# Altium PCB PCB2.PcbDoc
Units mm, origin at the board's own origin, x right, y up, seen from the top; angles counter-clockwise.
Board outline 38.73 x 29.08 mm, 2 copper layers (Top Layer, Bottom Layer); 36 components, 30 nets, 162 pads, 19 vias.
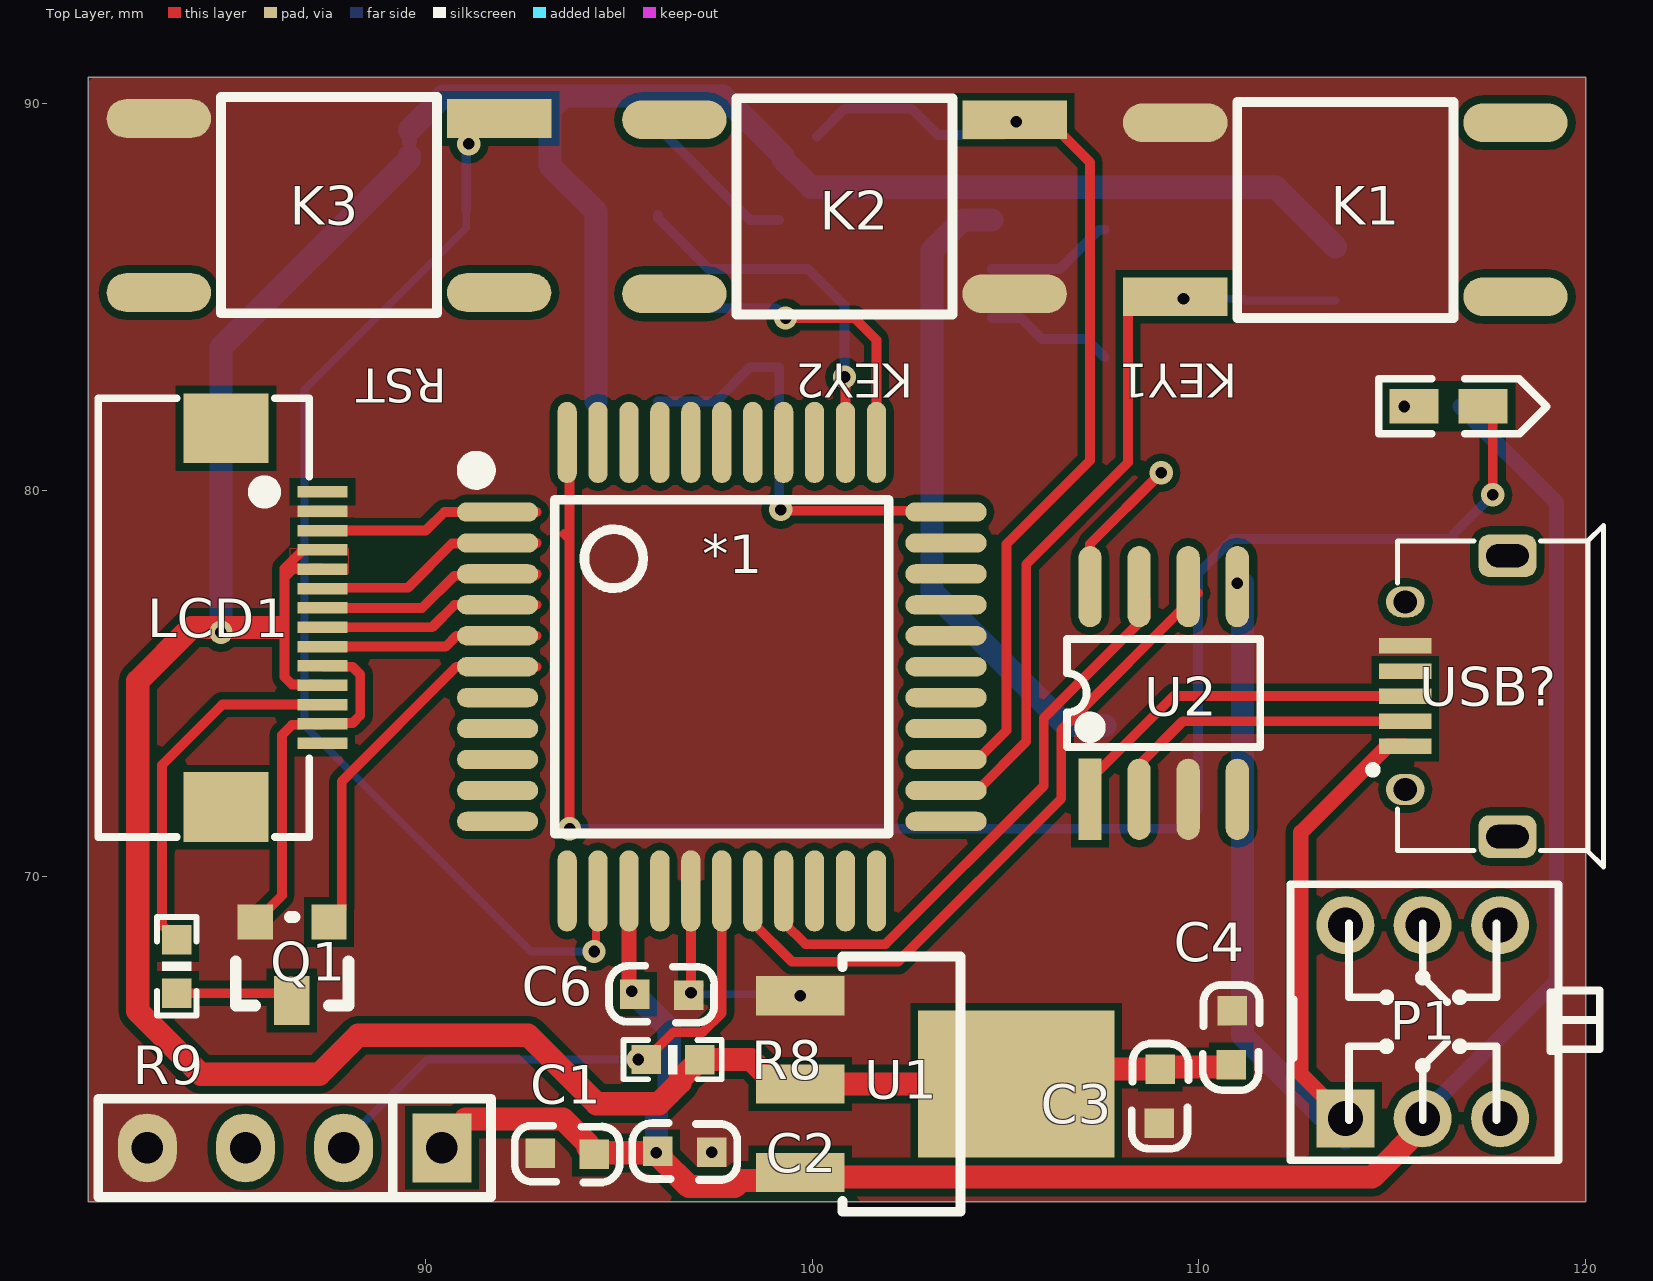
[diagram p0: Top Layer view]
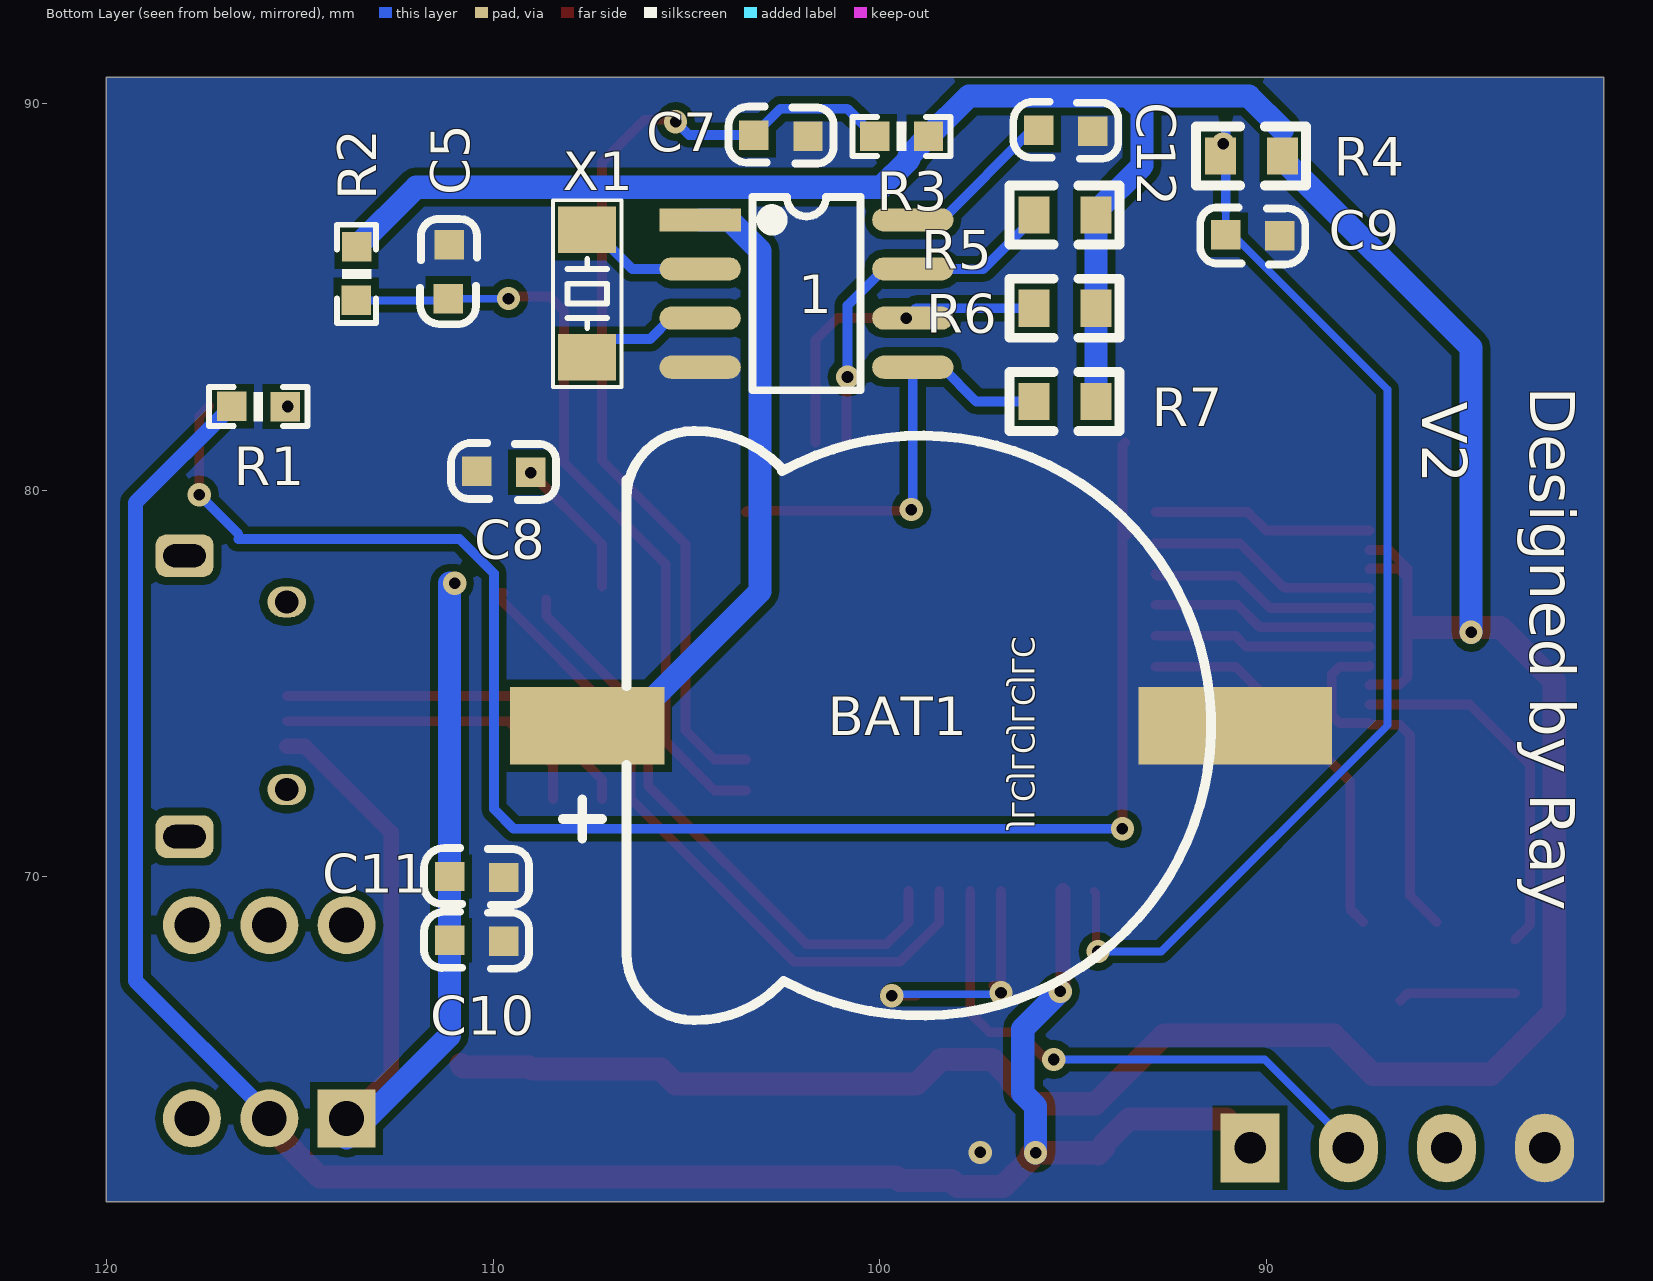
[diagram p1: Bottom Layer view, seen from below]
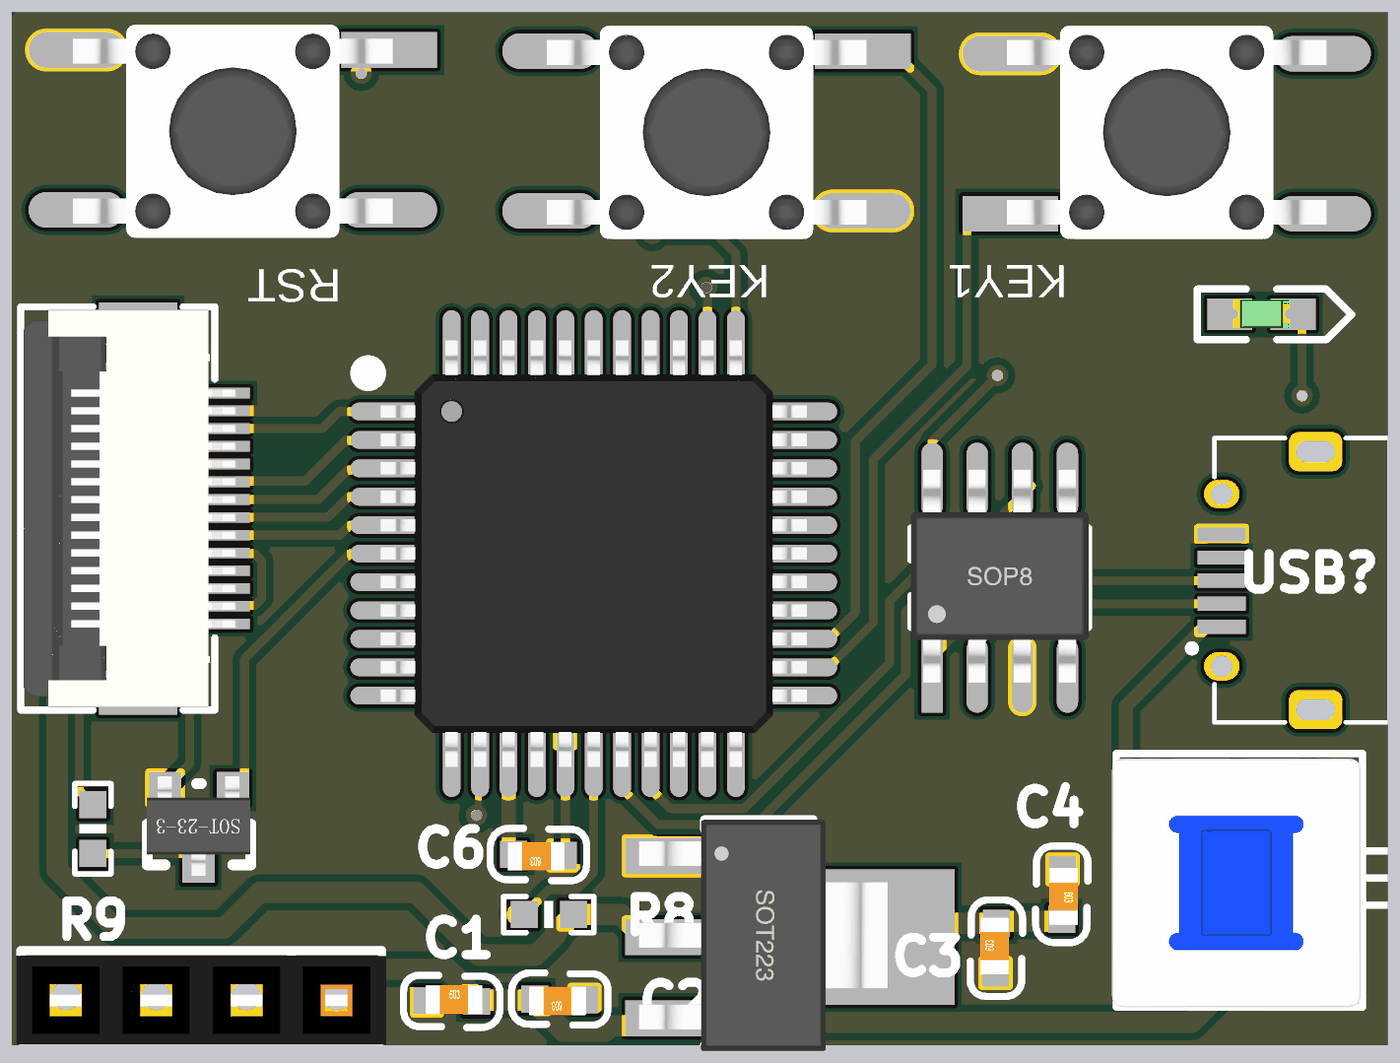
[diagram p2: 3D render of the assembled board from above, using the file's embedded part models]
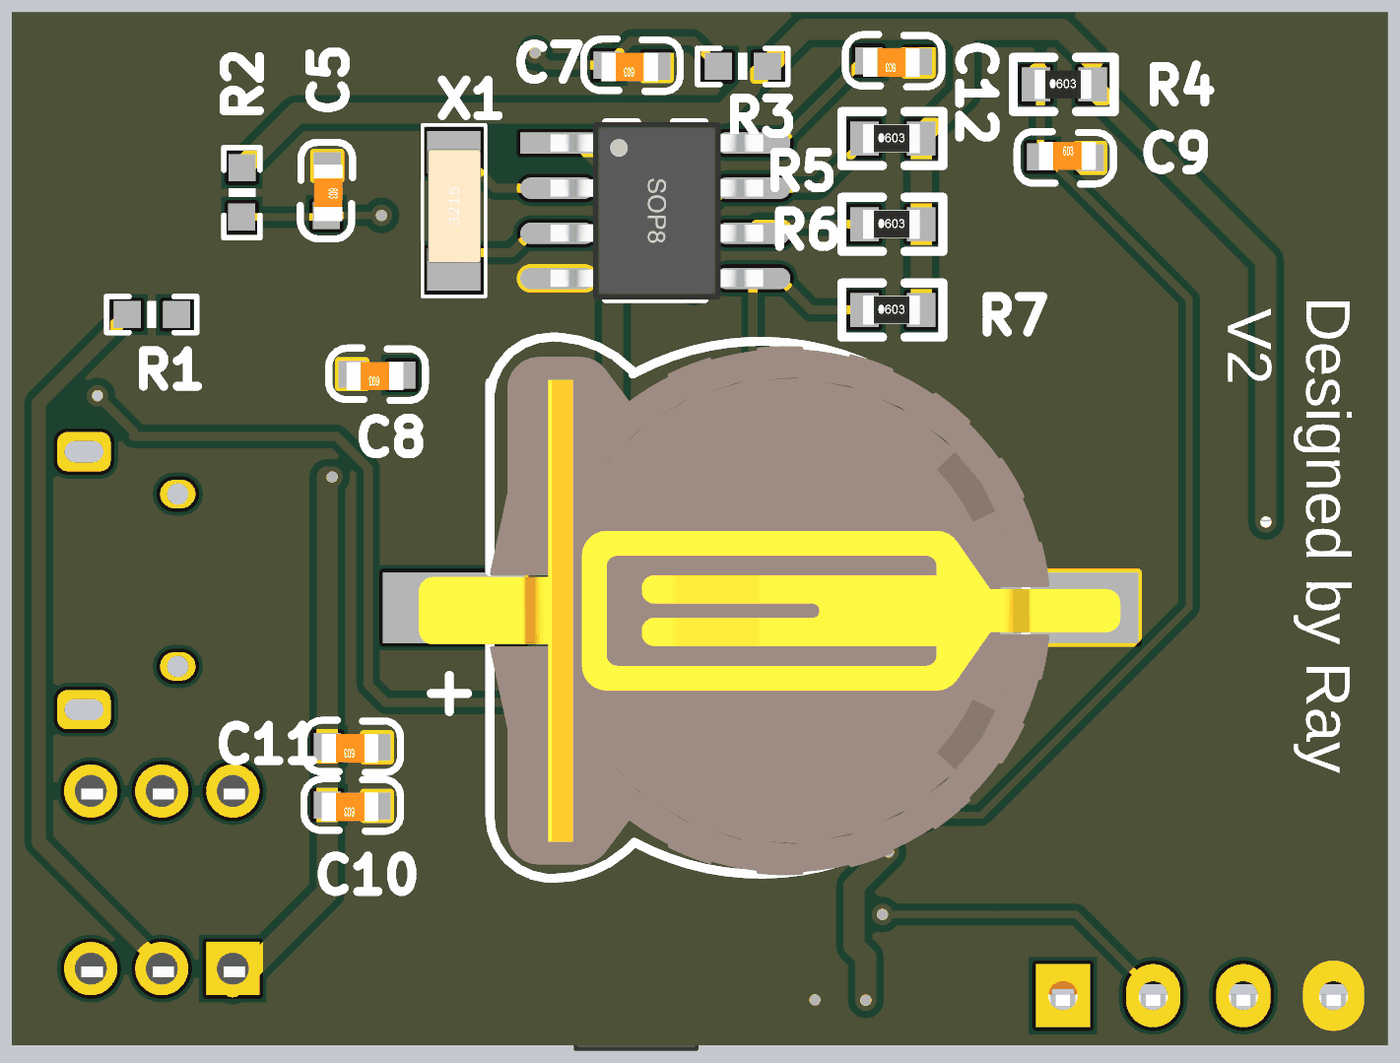
[diagram p3: 3D render of the assembled board from below, using the file's embedded part models]

## Layer stack, top to bottom
Top Solder: solder mask 0.0102, Solder Resist, Dk 3.5
Top Layer: signal copper 0.0356
Dielectric 1: dielectric 0.32, FR-4, Dk 4.8
Bottom Layer: signal copper 0.0356
Bottom Solder: solder mask 0.0102, Solder Resist, Dk 3.5

## Board outline
81.28,61.595 81.28,90.678 120.015,90.678 120.015,61.595

## Design rules (kind name [scope] priority, off if disabled: settings)
Clearance [All] p1: gap=0.2 ignorepadtopadclearanceinfootprint=FALSE
PlaneConnect [All] p1: planeconnectstyle=Direct reliefexpansion=0.508 reliefentries=4 reliefconductorwidth=0.254 reliefairgap=0.254
PolygonConnect [All] p1: connectstyle=Direct reliefconductorwidth=0.254 reliefentries=4 polygonreliefangle="90 Angle" airgapwidth=0.254
RoutingVias [All] p1: holewidth=0.711 width=1.27 viastyle="Through Hole" minholewidth=0.711 minwidth=1.27 maxholewidth=0.711 maxwidth=1.27
SolderMaskExpansion [All] p1: expansion=0.102
Width [All] p1: maxlimit=0.6 minlimit=0.2 preferedwidth=0.6
29 further rules are at their usual default settings.

## Classes and differential pairs
component class Sheet1: 1 *1 BAT1 C1 C2 C3 C4 C5 C6 C7 C8 C9 C10 C11 C12 K1 K2 K3 LCD1 P1 Q1 R1 R2 R3 R4 R5 R6 R7 R8 R9 U1 U2 USB? X1

## Components (designator, comment, footprint, x,y, rotation, side; value= is the part's Value field where it differs from the comment)
1 "DS1302ZN" SOP8 104.648,86.995 r180 bottom
*1 "STC8F2K60S4" LQFP44 97.79,75.438 r0 top
BAT1 "CR1220" CR1220-A1 107.569,73.914 r0 bottom
C1 "10uF" 0603C 92.964,62.865 r0 top
C2 "10uF" 0603C 97.409,62.865 r180 top
C3 "10uF" 0603C 108.966,63.627 r90 top
C4 "10uF" 0603C 110.871,66.548 r270 top
C5 "0.1uF" 0603C 111.125,86.36 r270 bottom
C6 "0.1uF" 0603C 96.81,66.933 r180 top
C7 "0.1uF" 0603C 101.854,89.154 r0 bottom
C8 "0.1uF" 0603C 109.029,80.454 r0 bottom
C9 "0.1uF" 0603C 91.059,86.614 r180 bottom
C10 "10uF" 0603C 109.728,68.326 r0 bottom
C11 "10uF" 0603C 109.728,69.977 r0 bottom
C12 "0.1uF" 0603C 94.488,89.281 r0 bottom
D1 "LED" LED-0603B 115.57,82.169 r0 top
K1 "KEY_M" SMD-6X6X5 109.474,85.09 r90 top
K2 "KEY_M" SMD-6X6X5 105.156,89.504 r270 top
K3 "KEY" SMD-6X6X5 91.821,89.535 r270 top
LCD1 "1.8寸SPI屏" FPC0.5-14P 84.836,76.708 r270 top
P1 "Header 3X2" "KFT DIP-7X7" 113.792,63.754 r90 top
Q1 "NPN" SOT-23 86.614,67.945 r180 top
R1 "1K" 0603P 116.078,82.169 r180 bottom
R2 "10K" 0603P 113.538,85.598 r90 bottom
R3 "10K" 0603P 99.441,89.154 r180 bottom
R4 "10K" 0603R 91.186,88.646 r180 bottom
R5 "10K" 0603R 96.012,87.122 r180 bottom
R6 "10K" 0603R 96.012,84.709 r180 bottom
R7 "10K" 0603R 96.012,82.296 r180 bottom
R8 "10K" 0603P 96.393,65.278 r0 top
R9 "10R" 0603P 83.566,67.691 r270 top
U1 "AMS1117" SOT223 99.695,64.643 r270 top
U2 "CH330N" sop8 107.188,72.009 r90 top
U3 "DHT11" Fe-HDR1X4/2.54-S 90.424,62.992 r270 top
USB? "USB-AB" USB_AB 117.983,74.676 r270 top
X1 "XTAL-2P" "OSC 3215-2P" 107.569,85.09 r90 bottom

## Footprints (in the part's own frame and the unit in brackets; to place one, negate y for a bottom-side part, rotate by r counter-clockwise, add the part's x,y. Pads: shape width x height; smd on the part's side, far side on the other; paste and mask are expansions set on the pad)
0603C [mil]
  rect 30x30 smd: 1(0.21,-0.35) 2(55.21,-1.35)
  silkscreen extent -26,-30 81,28, body extent -1,-15 62,17, height 12
0603P [mil]
  rect 30x30 smd: 1(-27,0) 2(27.5,-0.06)
  silkscreen extent -50,-20 50,20
0603R [mm]
  rect 0.8x0.965 smd: 1(0,0) 2(1.6,0)
  silkscreen extent -0.64,-0.76 2.21,0.76, body extent -0.04,-0.41 1.56,0.41, height 0.45
CR1220-A1 [mm]
  rect 4x2 smd: 1(0,0)
  rect 5x2 smd: 2(-16.764,0)
  silkscreen extent -16.13,-7.62 0.64,7.62, body extent -18.77,-7.37 0.99,7.53, height 4.05
Fe-HDR1X4/2.54-S [mil]
  rect 70x60 hole 32: 1(0,0)
  oval 70x60 hole 32: 2(0,-100) 3(0,-200) 4(0,-300)
  silkscreen extent -50,-350 50,50, body extent -44,-355 54,55, height 335
FPC0.5-14P [mm]
  rect 1.8x2.2 smd: 0(-4.9,0) 0(4.9,0)
  rect 0.3x1.3 smd: 1(-3.25,2.497) 2(-2.75,2.497) 3(-2.25,2.497) 4(-1.75,2.497) 5(-1.25,2.497) 6(-0.75,2.497) 7(-0.25,2.497) 8(0.25,2.497) 9(0.75,2.497) 10(1.25,2.497) 11(1.75,2.497) 12(2.25,2.497) 13(2.75,2.497) 14(3.25,2.497)
  silkscreen extent -5.68,-3.3 5.68,2.16, body extent -5.6,-3.23 5.6,2.77, height 2
"KFT DIP-7X7" [mm]
  rect 1.5x1.5 hole 0.9: 1(0,0)
  round 1.5 hole 0.9: 2(0,-2) 3(0,-4) 4(5,-4) 5(5,-2) 6(5,0)
  silkscreen extent -1.08,-6.58 6.06,1.42, body extent -1.09,-5.46 5.91,1.54, height 11.2
LED-0603B [mil]
  rect 50x35 smd: A(0,0.26) K(70,0.26)
  silkscreen extent -36,-28 135,28, body extent 4,-15 66,17, height 24
LQFP44 [mm]
  oval 2.1x0.5 smd: 1(-5.927,4) 2(-5.927,3.2) 3(-5.927,2.4) 4(-5.927,1.6) 5(-5.927,0.8) 6(-5.927,0) 7(-5.927,-0.8) 8(-5.927,-1.6) 9(-5.927,-2.4) 10(-5.927,-3.2) 11(-5.927,-4) 23(5.673,-4) 24(5.673,-3.2) 25(5.673,-2.4) 26(5.673,-1.6) 27(5.673,-0.8) 28(5.673,0) 29(5.673,0.8) 30(5.673,1.6) 31(5.673,2.4) 32(5.673,3.2) 33(5.673,4)
  oval 0.5x2.1 smd: 12(-4.127,-5.8) 13(-3.327,-5.8) 14(-2.527,-5.8) 15(-1.727,-5.8) 16(-0.927,-5.8) 17(-0.127,-5.8) 18(0.673,-5.8) 19(1.473,-5.8) 20(2.273,-5.8) 21(3.073,-5.8) 22(3.873,-5.8) 34(3.873,5.8) 35(3.073,5.8) 36(2.273,5.8) 37(1.473,5.8) 38(0.673,5.8) 39(-0.127,5.8) 40(-0.927,5.8) 41(-1.727,5.8) 42(-2.527,5.8) 43(-3.327,5.8) 44(-4.127,5.8)
  silkscreen extent -6.73,-4.32 4.19,5.33, body extent -6.13,-6 5.87,6, height 1.5
"OSC 3215-2P" [mm]
  rect 1.2x1.5 smd: 1(-1.65,0) 2(1.65,0)
  silkscreen extent -2.41,-0.89 2.41,0.89, body extent -1.47,-0.76 1.73,0.74, height 0.61
SMD-6X6X5 [mm]
  rect 1x2.7 smd: 1(-0.08,0.082)
  oval 1x2.7 smd: 2(4.42,0.082) 3(-0.08,-8.718) 4(4.42,-8.718)
  silkscreen extent -0.63,-7.11 4.95,-1.52, body extent -0.79,-8.82 5.21,0.18, height 4.95
SOP8 [mm]
  rect 2.1x0.6 smd: 1(0,0)
  oval 2.1x0.6 smd: 2(0,-1.27) 3(0,-2.54) 4(0,-3.81) 5(5.5,-3.81) 6(5.5,-2.54) 7(5.5,-1.27) 8(5.5,0)
  silkscreen extent 1.35,-4.41 4.15,0.6, body extent -0.21,-4.4 5.8,0.6, height 1.9
sop8 [mm]
  rect 2.1x0.6 smd: 1(0,0)
  oval 2.1x0.6 smd: 2(0,-1.27) 3(0,-2.54) 4(0,-3.81) 5(5.5,-3.81) 6(5.5,-2.54) 7(5.5,-1.27) 8(5.5,0)
  silkscreen extent 1.35,-4.41 4.15,0.6, body extent -0.21,-4.4 5.8,0.6, height 1.9
SOT223 [mil]
  rect 40x90 smd: 1(-90,0) 2(0,0) 3(90,0)
  rect 150x200 smd: 2(0,220)
  silkscreen extent -130,43 130,163, body extent -130,-30 126,246, height 65
SOT-23 [mil]
  rect 36x36 smd: B(-35,-35) E(40,-35)
  rect 36x50 smd: C(3,45)
  silkscreen extent -55,-40 60,50, body extent -54,-48 60,62, height 47
USB_AB [mm]
  rect 0.4x1.35 smd: 1(1.3,-2.642) 2(0.65,-2.642) 3(0,-2.642) 4(-0.65,-2.642) 5(-1.3,-2.642)
  oval 0.8x1 hole 0.6: 6(-2.438,-2.642) 9(2.413,-2.642)
  rrect50% 1.1x1.5 hole 0.6 slot 1.1 at 90 deg: 7(-3.632,0) 8(3.632,0)
  silkscreen extent -4.42,-3.58 4.42,2.49

## Part data
C1 C2 C3 C4 C6 C9 C12: library part CAP, "无极性电容"
C5 C7 C8 C10 C11: library part Cap, "Capacitor", LatestRevisionDate=17-Jul-2002, LatestRevisionNote="Re-released for DXP Platform.", PackageDescription="Radial Cap, Thru-Hole; 2 Leads; 0.3 in Pin Spacing", PackageReference=RAD-0.3, Published=8-Jun-2000, Publisher="Altium Limited"
P1: "Header, 3-Pin, Dual row", LatestRevisionDate=17-Jul-2002, LatestRevisionNote="Re-released for DXP Platform.", Publisher="Altium Limited"
Q1: "NPN三极管"
R1 R2 R3 R9: library part Res2, "Resistor", LatestRevisionDate=17-Jul-2002, LatestRevisionNote="Re-released for DXP Platform.", PackageDescription="Axial Device, Thru-Hole; 2 Leads; 0.4 in Pin Spacing", PackageReference=AXIAL-0.4, Published=8-Jun-2000, Publisher="Altium Limited"
R4 R5 R6 R7: library part RES
R8: library part R
U1: "三端稳压芯片"
U3: "数字温湿度传感器"
USB?: "MicroUSB"
X1: "2脚无源脚晶振"

## Via types
v1: diameter 0.6, hole 0.3, Top Layer to Bottom Layer, tented both sides, 19 vias

## Nets (pads, with @x,y where several pads share a name; then routed paths per layer and width w, separated by ;. In a path a pad name is that pad's centre, name@x,y a point inside that pad or via, vN(x,y) a via of type N, cw(c..) or ccw(c..) an arc to the next point about the centre after c; other vN are vias at no path point)
3V3: C3.2 C4.2 LCD1.4 LCD1.5 LCD1.11 R2.2 R3.2 R4.2 R5.2 R6.2 R7.2 R8.2 U1.2 | length 98.9
  Top Layer w0.2: 86.352,76.454 86.356,76.458
  Top Layer w0.254: LCD1.11 87.31,74.981 86.548,74.981 86.356,75.173 86.356,76.458 86.356,77.743 ; LCD1.5 87.313,77.978 86.591,77.978 86.356,77.743 ; LCD1.4 86.833,78.458 86.356,77.981 86.356,77.743
  Top Layer w0.6: 86.183,76.454 84.709,76.454 83.947,76.454 82.558,75.065 82.558,66.53 84.191,64.897 87.254,64.897 88.262,65.905 92.655,65.905 94.424,64.135 96.033,64.135 96.588,64.69 96.588,64.773 R8.2 98.427,65.276 99.06,64.643 99.695,64.643 105.283,64.643 105.669,65.029 C3.2 109.058,65.087 110.779,65.087 C4.2
  Bottom Layer w0.4: R4.2@89.586,89.027 R4.2@89.586,89.109
  Bottom Layer w0.6: v1(84.709,76.327) 84.709,83.686 89.586,88.564 R4.2 ; 89.586,89.326 90.457,90.196 93.569,90.196 ; R7.2 R6.2 R5.2 94.412,87.204 93.218,88.399 93.218,89.845 93.569,90.196 ; R2.2 111.993,87.84 99.972,87.84 99.246,88.566 99.246,88.649 R3.2 97.698,90.196 93.569,90.196
5V5: *1.14 C1.2 C2.2 C6.2 P1.2 R1.1 U1.3 U3.1 | length 56.3
  Top Layer w0.254: C6.2@95.263,67.112 C6.2
  Top Layer w0.4: C6.2@95.263,67.112 *1.14
  Top Layer w0.6: U3.1 90.424,63.119 91.042,63.737 93.558,63.737 94.205,63.09 94.205,62.992 C1.2 94.401,62.865 v1(95.972,62.865) C2.2 96.088,62.818 96.088,62.721 96.815,61.993 97.992,61.993 98.148,62.149 99.487,62.149 99.576,62.238 114.483,62.238 115.792,63.547 P1.2
  Bottom Layer w0.4: P1.2@115.792,63.246 P1.2 115.792,63.849 119.253,67.31 119.253,79.68 R1.1
  Bottom Layer w0.6: v1(95.335,67.039) 96.304,66.071 96.304,64.403 95.972,64.071 v1(95.972,62.865)
BG_CTRL: *1.6 Q1.B | length 10
  Top Layer w0.254: Q1.B 87.833,69.164 87.833,72.466 90.805,75.438 *1.6@92.879,75.438
CLK_RST: 1.5 *1.33 R7.1 | length 11.5
  Top Layer w0.254: v1(99.187,79.502) 99.219,79.47 103.431,79.47 *1.33
  Bottom Layer w0.254: R7.1 97.509,82.296 98.398,83.185 1.5 99.148,79.541 v1(99.187,79.502)
DATA: *1.17 R8.1 U3.2 | length 14.4
  Top Layer w0.254: U3.2 U3.2@87.884,63.119 ; R8.1 96.414,65.984 97.166,65.984 97.663,66.481 *1.17
  Bottom Layer w0.2: U3.2 87.884,63.119 90.043,65.278 v1(95.504,65.278)
GND: 1.4 *1.16 BAT1.2 C1.1 C2.1 C3.1 C4.1 C5.1 C6.1 C7.1 C8.2 C9.2 C10.1 C11.1 C12.1 K1.2 K2.2 K3.3 LCD1.2 LCD1.10 LCD1.13 Q1.E U1.1 U2.3 U3.4 USB?.5 | length 16
  Top Layer w0.254: Q1.E 86.287,69.523 86.287,73.675 86.548,73.935 87.31,73.935 LCD1.13 87.356,73.981 88.118,73.981 88.31,74.173 88.31,75.243 88.118,75.435 87.356,75.435 LCD1.10 ; C6.1 v1(96.868,67.005) ; *1.16 96.863,67.098 C6.1@96.959,67.001 ; C6.1@96.931,66.942 v1(96.868,67.005) ; C6.1@97.058,67.196 v1(96.868,67.005) ; U1.1@99.06,66.929 v1(99.695,66.929)
  Bottom Layer w0.2: v1@96.959,67.001 96.995,66.965 99.659,66.965 v1(99.695,66.929)
  other v1: 97.404,62.874
IO: 1.6 *1.34 R6.1 | length 8.6
  Top Layer w0.254: v1(99.314,84.455) 101.092,84.455 101.663,83.884 *1.34
  Bottom Layer w0.254: R6.1 99.06,84.709 v1(99.314,84.455)
KEY2: *1.24 C5.2 K1.1 R2.1 | length 20.2
  Top Layer w0.254: *1.24 104.279,72.238 105.537,73.496 105.537,78.086 108.169,80.718 108.169,84.637 108.542,85.01 K1.1
  Bottom Layer w0.2: v1@109.601,84.963 v1(109.606,84.958) C5.2 111.205,84.912 R2.1
KEY3: *1.25 C7.2 K2.1 R3.1 | length 25.8
  Top Layer w0.254: *1.25 104.279,73.038 105.029,73.788 105.029,78.613 107.188,80.772 107.188,88.484 106.088,89.584 K2.1
  Bottom Layer w0.254: R3.1 100.844,89.871 102.574,89.871 C7.2 104.936,89.188 v1(105.283,89.535)
LCD_CS: *1.1 LCD1.3 | length 5.7
  Top Layer w0.254: LCD1.3 90.007,78.958 90.487,79.438 *1.1@92.879,79.438
LCD_DCX: *1.4 LCD1.8 | length 5.8
  Top Layer w0.254: LCD1.8 90.174,76.458 90.754,77.038 *1.4@92.879,77.038
LCD_RST: *1.5 LCD1.9 | length 5.7
  Top Layer w0.254: LCD1.9 90.525,75.958 90.805,76.238 *1.5@92.879,76.238
LCD_SCL: *1.2 LCD1.6 | length 6
  Top Layer w0.254: LCD1.6 87.356,77.481 89.546,77.481 90.686,78.621 92.862,78.621 *1.2@92.879,78.638
LCD_SDA: *1.3 LCD1.7 | length 5.9
  Top Layer w0.254: LCD1.7 89.912,76.958 90.745,77.791 92.832,77.791 *1.3@92.879,77.838
Net1_1: 1.1 BAT1.1 | length 16.6
  Bottom Layer w0.6: 1.1 103.898,86.995 103.098,86.195 103.098,77.385 106.569,73.914 BAT1.1
Net1_2: 1.2 X1.2 | length 3.3
  Bottom Layer w0.254: 1.2 106.404,85.725 107.419,86.74 X1.2
Net1_3: 1.3 X1.1 | length 3.3
  Bottom Layer w0.254: 1.3 105.398,84.455 105.94,83.913 107.096,83.913 X1.1
Net1_8: 1.8 C12.2 | length 4.2
  Bottom Layer w0.254: C12.2 96.078,89.315 98.398,86.995 1.8
Net*1_44: *1.44 D1.K | length 43.6
  Top Layer w0.254: 93.599,78.867 93.726,78.74 ; *1.44 93.726,81.175 93.726,78.74 ; v1(93.726,71.247) 93.726,78.74 ; D1.K 117.602,81.922 v1(117.602,79.883)
  Bottom Layer w0.254: v1(93.726,71.247) 109.474,71.247 109.982,71.755 109.982,77.851 110.871,78.74 116.594,78.74 ; 116.594,78.875 v1(117.602,79.883)
NetC8_1: C8.1 U2.8 | length 3.7
  Top Layer w0.254: U2.8 107.188,78.613 v1(109.029,80.454)
NetD1_A: D1.A R1.2
  other v1: 115.316,82.169
NetLCD1_12: LCD1.12 R9.1 | length 9.5
  Top Layer w0.254: R9.1 83.185,68.758 83.185,72.898 84.745,74.458 LCD1.12
NetQ1_C: Q1.C R9.2 | length 3.1
  Top Layer w0.254: R9.2 86.347,66.992 Q1.C
NetU2_1: U2.1 USB?.3 | length 9.6
  Top Layer w0.254: U2.1 107.188,72.517 109.347,74.676 USB?.3
NetU2_2: U2.2 USB?.2 | length 8.2
  Top Layer w0.254: U2.2 108.458,72.898 109.586,74.026 USB?.2
RST: *1.13 C9.1 K3.1 R4.1 | length 28.8
  Top Layer w0.2: v1(94.361,68.072) 94.412,68.123 94.412,69.587 *1.13
  Bottom Layer w0.2: 91.054,87.24 91.054,86.79 86.868,82.605 86.868,73.927 92.723,68.072 v1(94.361,68.072)
  Bottom Layer w0.254: 91.054,87.24 R4.1@91.054,88.895 ; 91.054,89.276 R4.1@91.054,88.895 ; R4.1@91.186,89.027 v1(91.12,88.961) R4.1@91.054,88.895
SCLK: 1.7 *1.35 R5.1 | length 9.4
  Top Layer w0.254: v1(100.838,82.931) 100.863,82.906 *1.35
  Bottom Layer w0.254: R5.1 96.012,87.04 97.327,85.725 1.7 99.898,85.725 100.838,84.785 v1(100.838,82.931)
USART2_RX: *1.18 U2.6 | length 18
  Top Layer w0.254: *1.18 98.463,68.822 99.478,67.807 102.224,67.807 106.445,72.028 106.445,73.806 109.982,77.343 U2.6@109.728,77.343
USART2_TX: *1.19 U2.7 | length 15.4
  Top Layer w0.254: *1.19 99.263,68.822 99.824,68.261 101.902,68.261 105.991,72.35 105.991,74.114 108.629,76.752 U2.7@108.629,77.172
VCC: C10.2 C11.2 P1.1 U2.5 USB?.1 | length 27.7
  Top Layer w0.4: P1.1@114.3,63.246 P1.1 112.642,64.904 112.642,71.152 114.866,73.376 USB?.1
  Bottom Layer w0.6: v1@111.125,77.597 111.13,77.592 C11.2 C10.2 111.13,65.908 P1.1@113.792,63.246
  other v1: 110.998,77.597
pads on no net: *1.7 *1.8 *1.9 *1.10 *1.11 *1.12 *1.15 *1.20 *1.21 *1.22 *1.23 *1.26 *1.27 *1.28 *1.29 *1.30 *1.31 *1.32 *1.36 *1.37 *1.38 *1.39 *1.40 *1.41 *1.42 *1.43 K1.3 K1.4 K2.3 K2.4 K3.2 K3.4 LCD1.0 LCD1.1 LCD1.14 P1.3 P1.4 P1.5 P1.6 U2.4 U3.3 USB?.4 USB?.6 USB?.7 USB?.8 USB?.9

## Polygon pours and split planes (outlines as drawn)
GND on Top Layer "Top Layer-GND" (solid, pour order 10): 81.28,90.551 81.407,90.678 120.015,90.678 120.015,61.595 81.28,61.595
3V3 on Top Layer "Top Layer-3V3" (solid, pour order 4): 88.011,78.486 86.487,78.486 86.487,77.874 86.473,77.861 86.483,77.851 88.011,77.851
GND on Bottom Layer "Bottom Layer-GND" (solid, pour order 12): 81.28,90.678 81.28,61.595 120.015,61.595 120.015,90.678

## Silkscreen, mask and mechanical layers (free items; w line width, h text height)
Top Overlay:
  text "KEY2" at 102.616,83.566 h1.5 r180
  text "KEY1" at 110.998,83.566 h1.5 r180
  text "RST" at 90.551,83.439 h1.5 r180
Bottom Overlay:
  text "Designed by Ray" at 83.566,82.677 h2 r90
  text "V2" at 86.36,82.296 h2 r90
  text "JLCJLCJLCJLC" at 96.774,71.247 h1 r90
Mechanical 13:
  lines w0.254: 81.28,61.595 120.015,61.595 120.015,90.678 119.761,90.678 81.28,90.678 81.28,61.595